# EAGLE board expLoRaBLE Thing Plus (EAGLE 9.6.2)
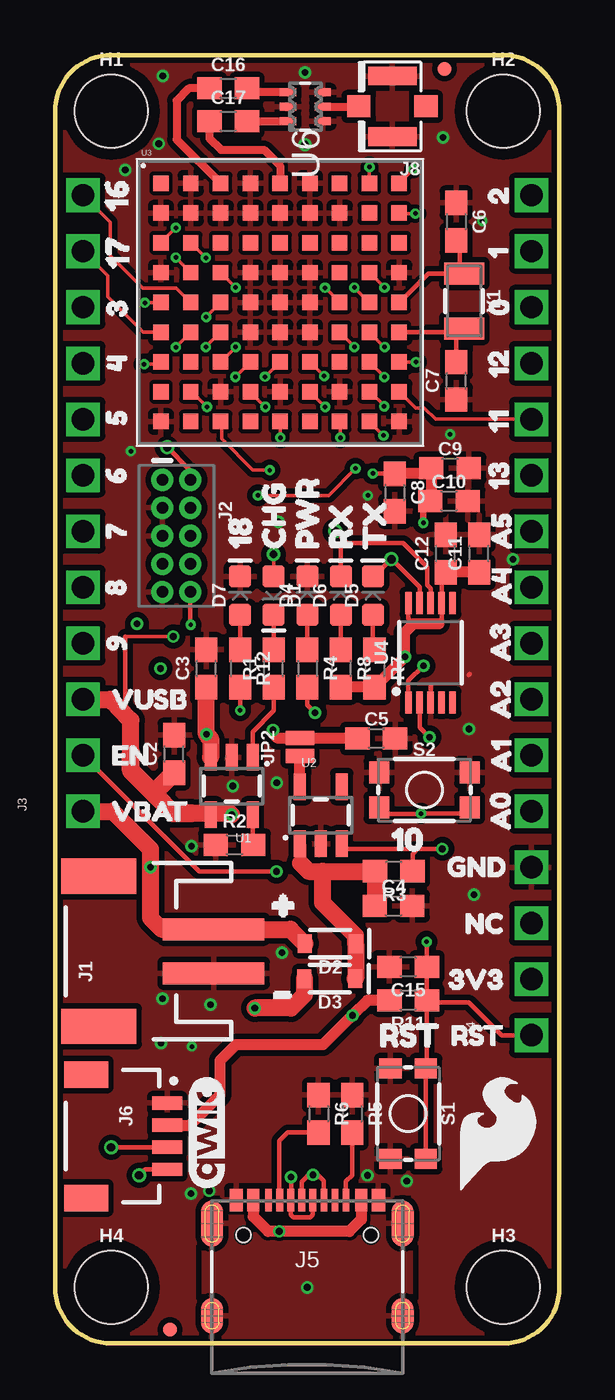
[diagram p0: board, top side]
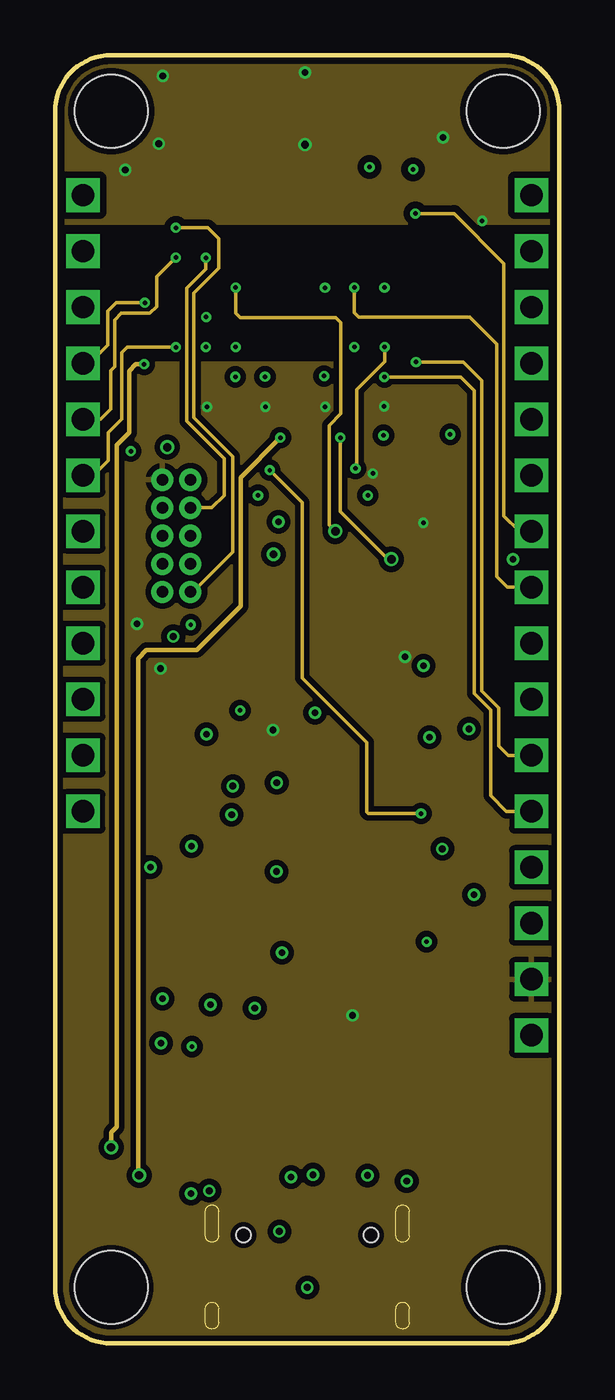
[diagram p1: board, inner layer Route2]
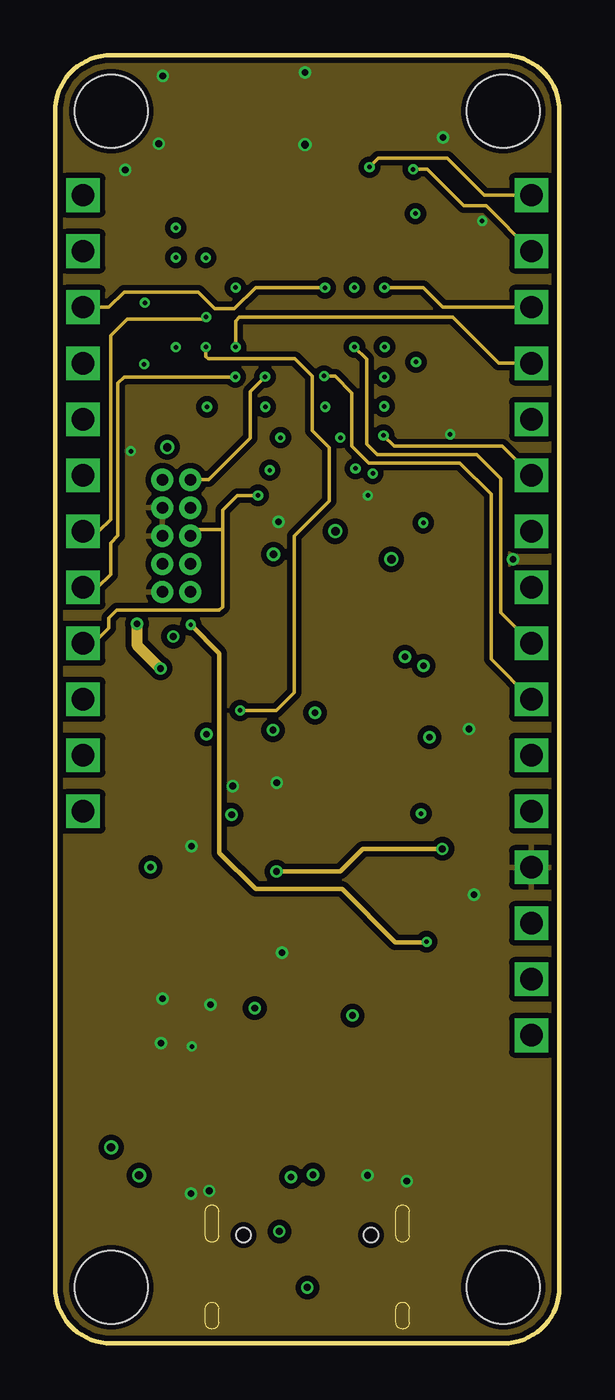
[diagram p2: board, inner layer Route15]
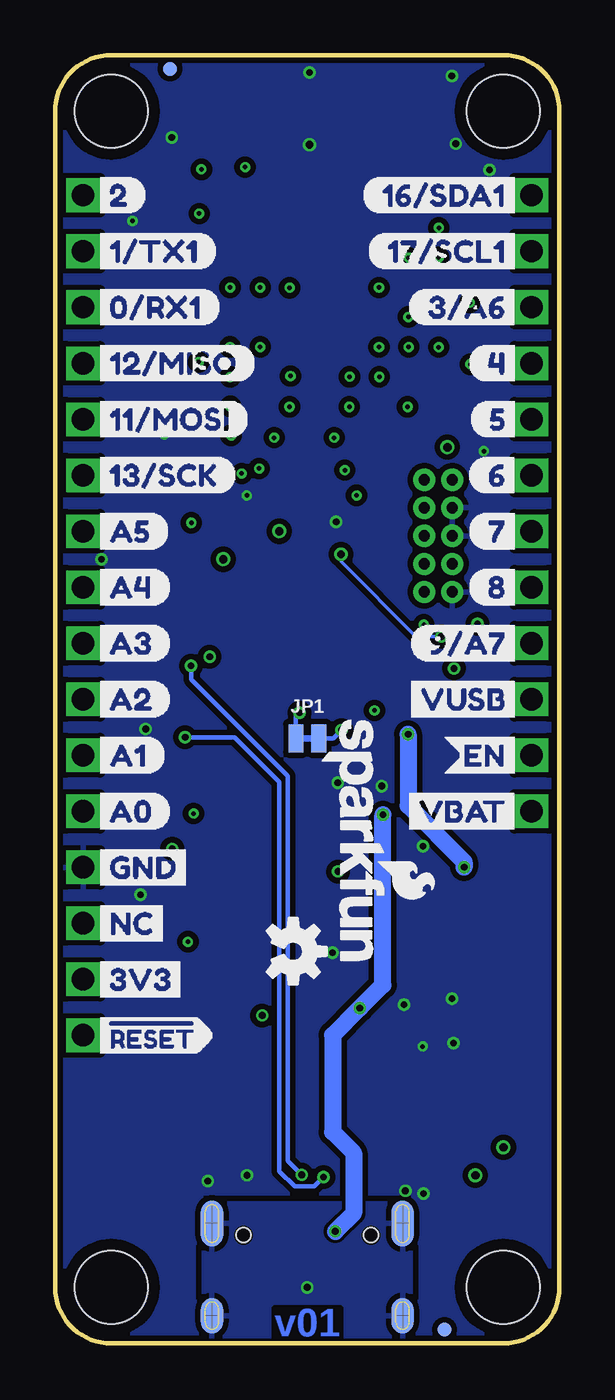
[diagram p3: board, bottom side, seen from below]

Size 22.86 x 58.42 mm. Coordinates in mm from the lower left corner, seen from the top.
Outline: 0,55.88 0,2.54 arc90 2.54,0 20.32,0 arc90 22.86,2.54 22.86,55.88 arc90 20.32,58.42 2.54,58.42 arc90 0,55.88
Copper layers (1+2*15+16): Top 0.035559375mm / dielectric 0.2mm / Route2 0.035559375mm / dielectric 1mm / Route15 0.035559375mm / dielectric 0.2mm / Bottom 0.035559375mm
Design rules "SparkFun-4-layer-FAB-LIMIT *": minimum track width 6mil, minimum drill 8mil, track to track 6mil, track to pad 6mil, pad to pad 6mil, via to via 6mil, smd to smd 6mil, copper to edge 4mil, drill to drill 4mil, minimum pad ring 5mil, minimum via ring 5mil, stop-mask expansion 4mil, vias tented up to drill 25mil, thermal gap 10mil
Net classes: 1 power: width 0.762 mm

## Footprints (pad centres in the part's own frame; a part is rotated, then mirrored left to right if it is on the bottom)
0603 = smd 1.1 x 1: 1 -0.85,0; 2 0.85,0
LED-0603 = smd 1 x 1: A -0.877,0; C 0.877,0
SOD-323 = smd 0.63 x 0.83: A 1.15,0; C -1.15,0
FIDUCIAL-MICRO = smd 0.635 x 0.635: 1 0,0
STAND-OFF = hole 3.302: 0,0
JST-2-SMD = smd 1 x 4.6: 1 -1,-3.7; 2 1,-3.7 | smd 1.6 x 3.4: NC1 -3.4,1.5; NC2 3.4,1.5
2X5-PTH-1.27MM-NO_SILK = drill 0.508 pad 1: 1 -2.54,-0.635; 2 -2.54,0.635; 3 -1.27,-0.635; 4 -1.27,0.635; 5 0,-0.635; 6 0,0.635; 7 1.27,-0.635; 8 1.27,0.635; 9 2.54,-0.635; 10 2.54,0.635
1X12_SM_SQ_NOSILK = drill 1.016 pad 1.27 square: 1 0,0; 2 2.54,0; 3 5.08,0; 4 7.62,0; 5 10.16,0; 6 12.7,0; 7 15.24,0; 8 17.78,0; 9 20.32,0; 10 22.86,0; 11 25.4,0; 12 27.94,0
1X16_SM_SQ_NOSILK = drill 1.016 pad 1.27 square: 1 0,0; 2 2.54,0; 3 5.08,0; 4 7.62,0; 5 10.16,0; 6 12.7,0; 7 15.24,0; 8 17.78,0; 9 20.32,0; 10 22.86,0; 11 25.4,0; 12 27.94,0; 13 30.48,0; 14 33.02,0; 15 35.56,0; 16 38.1,0
USB-C-16P = smd 0.3 x 1.016: A5 -1.25,0.154; A6 -0.25,0.154; A7 0.25,0.154; A8 1.25,0.154; B5 1.75,0.154; B6 0.75,0.154; B7 -0.75,0.154; B8 -1.75,0.154 | smd 0.6 x 1.016: GND -3.225,0.154; GND2 3.225,0.154 | smd 1 x 2.1: SHLD1 -4.32,-0.915; SHLD2 4.32,-0.915 | smd 1 x 2.1 bottom: SHLD3 -4.32,-0.915; SHLD4 4.32,-0.915 | smd 1 x 1.6: SHLD5 -4.32,-5.095; SHLD8 4.32,-5.095 | smd 1 x 1.6 bottom: SHLD6 -4.32,-5.095; SHLD7 4.32,-5.095 | smd 0.55 x 1.016: VBUS1 -2.45,0.154; VBUS2 2.45,0.154 | hole 0.65: -2.89,-1.445; 2.89,-1.445
JST04_1MM_RA = smd 0.6 x 1.35: 1 -1.5,0; 2 -0.5,0; 3 0.5,0; 4 1.5,0 | smd 1.2 x 2: NC1 2.8,-3.675; NC2 -2.8,-3.675
U.FL = smd 2.2 x 0.85: 1 0,1.375; 2 0,-1.375 | smd 1.05 x 1: FEED 1.525,0; NC -1.525,0
SMT-JUMPER_2_NC_TRACE_NO-SILK = smd 0.66 x 1.27: 1 -0.521,0; 2 0.521,0
SMT-JUMPER_2_NC_PASTE_NO-SILK = smd 0.635 x 1.27: 1 -0.406,0; 2 0.406,0
TACTILE_SWITCH_SMD_4.6X2.8MM = smd 0.9 x 1: 1 -2.05,-0.8; 2 2.05,-0.8; 3 2.05,0.8; 4 -2.05,0.8
TP_15TH = drill 0.381 pad 0.61: P$1 0,0
SOT23-5 = smd 0.55 x 1.2: 1 -0.95,-1.3; 2 0,-1.3; 3 0.95,-1.3; 4 0.95,1.3; 5 -0.95,1.3
LGA81 = smd 0.7 x 0.7: A1 -5.4,5.4; A2 -4.05,5.4; A3 -2.7,5.4; A4 -1.35,5.4; A5 0,5.4; A6 1.35,5.4; A7 2.7,5.4; A8 4.05,5.4; A9 5.4,5.4; B1 -5.4,4.05; B2 -4.05,4.05; B3 -2.7,4.05; B4 -1.35,4.05; B5 0,4.05; B6 1.35,4.05; B7 2.7,4.05; B8 4.05,4.05; B9 5.4,4.05; C1 -5.4,2.7; C2 -4.05,2.7; C3 -2.7,2.7; C4 -1.35,2.7; C5 0,2.7; C6 1.35,2.7; C7 2.7,2.7; C8 4.05,2.7; C9 5.4,2.7; D1 -5.4,1.35; D2 -4.05,1.35; D3 -2.7,1.35; D4 -1.35,1.35; D5 0,1.35; D6 1.35,1.35; D7 2.7,1.35; D8 4.05,1.35; D9 5.4,1.35; E1 -5.4,0; E2 -4.05,0; E3 -2.7,0; E4 -1.35,0; E5 0,0; E6 1.35,0; E7 2.7,0; E8 4.05,0; E9 5.4,0; F1 -5.4,-1.35; F2 -4.05,-1.35; F3 -2.7,-1.35; F4 -1.35,-1.35; F5 0,-1.35; F6 1.35,-1.35; F7 2.7,-1.35; F8 4.05,-1.35; F9 5.4,-1.35; G1 -5.4,-2.7; G2 -4.05,-2.7; G3 -2.7,-2.7; G4 -1.35,-2.7; G5 0,-2.7; G6 1.35,-2.7; G7 2.7,-2.7; G8 4.05,-2.7; G9 5.4,-2.7; H1 -5.4,-4.05; H2 -4.05,-4.05; H3 -2.7,-4.05; H4 -1.35,-4.05; H5 0,-4.05; H6 1.35,-4.05; H7 2.7,-4.05; H8 4.05,-4.05; H9 5.4,-4.05; J1 -5.4,-5.4; J2 -4.05,-5.4; J3 -2.7,-5.4; J4 -1.35,-5.4; J5 0,-5.4; J6 1.35,-5.4; J7 2.7,-5.4; J8 4.05,-5.4; J9 5.4,-5.4
MSOP10 = smd 1 x 0.3: 1 -2.25,1; 2 -2.25,0.5; 3 -2.25,0; 4 -2.25,-0.5; 5 -2.25,-1; 6 2.25,-1; 7 2.25,-0.5; 8 2.25,0; 9 2.25,0.5; 10 2.25,1
RF_4060A1_TDK = smd 0.356 x 0.737: 1 -0.65,-0.787; 2 0,-0.787; 3 0.65,-0.787; 4 0.65,0.787; 5 0,0.787; 6 -0.65,0.787
CRYSTAL-SMD-3.2X1.5MM = smd 1 x 1.8: P$1 -1.25,0; P$2 1.25,0

## Placement (x,y rotation side)
C2  4.7uF  [0603]  5.4,26.73 90 top
C3  4.7uF  [0603]  6.86,30.61 90 top
C4  1.0uF  [0603]  15.34,19.84 0 top
C5  1.0uF  [0603]  14.56,27.43 0 top
C6  15pF  [0603]  18.17,50.87 270 top
C7  15pF  [0603]  18.18,43.65 90 top
C8  10uF  [0603]  15.39,38.59 270 top
C9  1.0uF  [0603]  17.9,39.68 0 top
C10  0.1uF  [0603]  17.85,38.2 0 top
C11  0.1uF  [0603]  19.22,35.82 90 top
C12  10nF  [0603]  17.7,35.82 90 top
C15  1nF  [0603]  16,17.08 180 top
C16  47pF  [0603]  7.84,56.91 0 top
C17  10pF  [0603]  7.84,55.42 0 top
D1  Yellow  [LED-0603]  9.91,33.91 270 top
D2  3A/10V/280mV  [SOD-323]  12.47,18.12 180 top
D3  3A/10V/280mV  [SOD-323]  12.45,16.54 180 top
D4  RED  [LED-0603]  11.43,33.91 90 top
D5  GREEN  [LED-0603]  14.4,33.91 90 top
D6  Yellow  [LED-0603]  12.95,33.91 90 top
D7  BLUE  [LED-0603]  8.38,33.91 90 top
FD1  FIDUCIALUFIDUCIAL  [FIDUCIAL-MICRO]  17.65,57.78 0 bottom
FD2  FIDUCIALUFIDUCIAL  [FIDUCIAL-MICRO]  17.65,57.78 0 top
FD3  FIDUCIALUFIDUCIAL  [FIDUCIAL-MICRO]  5.21,0.64 0 bottom
FD4  FIDUCIALUFIDUCIAL  [FIDUCIAL-MICRO]  5.21,0.64 0 top
FRAME1  FRAME-LETTER  [CREATIVE_COMMONS]  -12.7,-20.32 0 top  (outside the outline)
FRAME2  FRAME-LETTERNO_PACKAGE  [DUMMY]  -12.7,-20.32 0 top  (outside the outline)
H1  STAND-OFF  [STAND-OFF]  2.54,55.88 0 top
H2  STAND-OFF  [STAND-OFF]  20.32,55.88 0 top
H3  STAND-OFF  [STAND-OFF]  20.32,2.54 0 top
H4  STAND-OFF  [STAND-OFF]  2.54,2.54 0 top
J1  [JST-2-SMD]  3.48,17.78 90 top
J2  CORTEX_DEBUG  [2X5-PTH-1.27MM-NO_SILK]  5.5,36.62 270 top
J3  [1X12_SM_SQ_NOSILK]  1.27,24.13 90 top
J4  [1X16_SM_SQ_NOSILK]  21.59,13.97 90 top
J5  USB-C  [USB-C-16P]  11.43,6.35 0 top
J6  [JST04_1MM_RA]  5.08,9.4 270 top
J8  U.FL  [U.FL]  15.28,56.1 180 top
JP1  JUMPER-SMT_2_NC_TRACE_NO-SILK  [SMT-JUMPER_2_NC_TRACE_NO-SILK]  11.43,27.43 0 bottom
JP2  JUMPER-SMT_2_NC_PASTE_NO-SILK  [SMT-JUMPER_2_NC_PASTE_NO-SILK]  11.1,27.05 90 top
LOGO1  OSHW-LOGOS  [OSHW-LOGO-S]  12.06,17.78 270 bottom
LOGO2  QWIIC_LOGO_5MM  [QWIIC_5MM]  6.86,9.53 90 top
LOGO3  SFE_LOGO_NAME_FLAME.1_INCH  [SFE_LOGO_NAME_FLAME_.1]  10.86,28.7 270 bottom
R1  1k  [0603]  9.91,30.61 90 top
R2  2.0k  [0603]  8.13,22.61 0 top
R3  10k  [0603]  15.35,21.41 180 top
R4  1k  [0603]  11.43,30.61 270 top
R5  5.1k  [0603]  13.46,10.41 270 top
R6  5.1k  [0603]  11.94,10.41 270 top
R7  1k  [0603]  14.48,30.61 270 top
R8  1k  [0603]  12.95,30.61 270 top
R11  100k  [0603]  16,15.56 180 top
R12  1k  [0603]  8.38,30.61 270 top
S1  RESET  [TACTILE_SWITCH_SMD_4.6X2.8MM]  16,10.41 270 top
S2  USER  [TACTILE_SWITCH_SMD_4.6X2.8MM]  16.74,25.1 0 top
TP1  TEST-POINTTP_15TH_THRU  [TP_15TH]  5.08,40.64 0 top
TP2  TEST-POINTTP_15TH_THRU  [TP_15TH]  12.7,36.83 0 top
TP3  TEST-POINTTP_15TH_THRU  [TP_15TH]  15.24,35.56 0 top
TP4  TEST-POINTTP_15TH_THRU  [TP_15TH]  3.81,7.62 0 top
TP5  TEST-POINTTP_15TH_THRU  [TP_15TH]  2.54,8.89 0 top
U1  MCP73831  [SOT23-5]  8,25.27 180 top
U2  3.3V  [SOT23-5]  12.04,23.95 0 top
U3  NM180100  [LGA81]  10.2,47.21 0 top
U4  CH340E_MSOP10  [MSOP10]  17.02,31.32 90 top
U6  DPX202700DT-4162A1  [RF_4060A1_TDK]  11.34,56.08 90 top
U$1  [160]  2.77,50.46 90 top
U$2  [171]  2.82,47.87 90 top
U$3  [32]  2.79,45.75 90 top
U$4  [43]  2.79,43.28 90 top
U$5  [54]  2.77,40.83 90 top
U$6  [65]  2.74,38.2 90 top
U$7  [76]  2.77,35.55 90 top
U$8  [87]  2.74,32.96 90 top
U$9  [98]  2.79,30.61 90 top
U$10  [VUSB9]  1.78,29.21 0 top
U$11  [EN10]  1.78,26.67 0 top
U$12  [VBAT11]  1.78,24.13 0 top
U$13  [227]  20.09,50.86 90 top
U$14  [126]  20.07,48.41 90 top
U$15  [025]  20.12,45.81 90 top
U$16  [1123]  20.09,40.5 90 top
U$17  [1224]  20.09,42.81 90 top
U$18  [1322]  20.1,37.92 90 top
U$19  [A521]  20.22,35.23 90 top
U$20  [A420]  20.23,32.73 90 top
U$21  [A319]  20.18,30.14 90 top
U$22  [A218]  20.19,27.39 90 top
U$23  [A117]  20.21,25.12 90 top
U$24  [A016]  20.18,22.48 90 top
U$25  [GND13]  16.98,21.62 0 top
U$26  [NC12]  17.78,19.05 0 top
U$27  [3V314]  17.02,16.51 0 top
U$28  [RST15]  17.14,13.97 0 top
U$29  [184]  8.38,35.12 90 top
U$30  [CHG1]  9.91,35.12 90 top
U$31  [PWR2]  11.43,35.12 90 top
U$32  [RX3]  12.95,35.12 90 top
U$33  [TX4]  14.48,35.12 90 top
U$34  [20]  21.35,52.07 0 bottom
U$35  [1#TX11]  21.35,49.53 0 bottom
U$36  [0#RX12]  21.31,46.99 0 bottom
U$37  [12#MISO3]  21.31,44.45 0 bottom
U$38  [11#MOSI4]  21.34,41.91 0 bottom
U$39  [13#SCK5]  21.35,39.37 0 bottom
U$40  [A56]  21.31,36.83 0 bottom
U$41  [A47]  21.3,34.29 0 bottom
U$42  [A38]  21.34,31.75 0 bottom
U$43  [A29]  21.35,29.21 0 bottom
U$44  [A110]  21.3,26.67 0 bottom
U$45  [A011]  21.35,24.13 0 bottom
U$46  [GND12]  21.31,21.59 0 bottom
U$47  [NC13]  21.31,19.05 0 bottom
U$48  [3V314]  21.35,16.51 0 bottom
U$49  [#RESET15]  21.46,13.97 0 bottom
U$50  [16#SDA12]  8.95,52.07 0 bottom
U$51  [17#SCL13]  8.71,49.53 0 bottom
U$52  [412]  4.2,44.45 0 bottom
U$53  [513]  4.11,41.91 0 bottom
U$54  [614]  4.16,39.37 0 bottom
U$55  [715]  4.16,36.83 0 bottom
U$56  [816]  4.15,34.29 0 bottom
U$57  [9#A719]  6.79,31.75 0 bottom
U$58  [3#A60]  6.88,46.99 0 bottom
U$59  [VUSB25]  7.23,29.21 0 bottom
U$60  [EN26]  5.28,26.67 0 bottom
U$61  [VBAT27]  7.28,24.13 0 bottom
U$62  [100]  14.34,22.86 0 top
U$63  [RST1]  13.78,13.97 0 top
U$64  [FOUR_LAYER_WARNING]  -1.09,66.7 0 top  (outside the outline)
U$65  [SFE_LOGO_FLAME_.2]  18.05,6.69 0 top
U$67  [#0]  8.45,20.07 0 top
U$68  [#1]  8.45,16.13 0 top
Y1  32.768kHz  [CRYSTAL-SMD-3.2X1.5MM]  18.55,47.27 270 top

## Library data of the parts
C2 C3 = SparkFun-Capacitors; PROD_ID: CAP-08280
C4 C5 C9 = SparkFun-Capacitors; PROD_ID: CAP-00868
C6 C7 = SparkFun-Capacitors; PROD_ID: CAP-07881
C8 = SparkFun-Capacitors; PROD_ID: CAP-11015
C10 C11 = SparkFun-Capacitors; PROD_ID: CAP-00810
C12 = SparkFun-Capacitors; PROD_ID: CAP-00867
C15 = SparkFun-Capacitors; PROD_ID: CAP-07886
C16 = SparkFun-Capacitors; PROD_ID: CAP-08913
C17 = SparkFun-Capacitors; PROD_ID: CAP-11812
D1 D6 = SparkFun-LED; PROD_ID: DIO-09003
D2 D3 = SparkFun-DiscreteSemi; PROD_ID: DIO-14072
D4 = SparkFun-LED; PROD_ID: DIO-00819
D5 = SparkFun-LED; PROD_ID: DIO-00821
D7 = SparkFun-LED; PROD_ID: DIO-08575
FD1-FD4 FRAME1 LOGO1-LOGO3 U$64 U$65 = SparkFun-Aesthetics
FRAME2 = SparkFun-Aesthetics; DESIGNER: Nobody; VERSION: v01
H1-H4 = SparkFun-Hardware
J1 = SparkFun-Connectors; PROD_ID: CONN-11443; SF_ID: PRT-08612
J2-J4 TP1-TP5 = SparkFun-Connectors
J5 = SparkFun-Connectors; PROD_ID: CONN-14122
J6 = SparkFun-Connectors; PROD_ID: CONN-13694
J8 = SparkFun-Connectors; PROD_ID: CONN-09193; SF_ID: WRL-09144
JP1 JP2 = SparkFun-Jumpers
R1 R4 R7 R8 R12 = SparkFun-Resistors; PROD_ID: RES-07856
R2 = SparkFun-Resistors; PROD_ID: RES-08296
R3 = SparkFun-Resistors; PROD_ID: RES-00824
R5 R6 = SparkFun-Resistors; PROD_ID: RES-12083
R11 = SparkFun-Resistors; PROD_ID: RES-07828
S1 S2 = SparkFun-Switches; PROD_ID: SWCH-13065
U1 = SparkFun-IC-Power; PROD_ID: IC-09995
U2 = SparkFun-IC-Power; PROD_ID: VREG-12457
U3 = JTD_Consulting
U4 = SparkFun-IC-Comms; PROD_ID: IC-14135
U6 = DPX202700DT; BUILT_BY: EMA_Matt; COPYRIGHT: Copyright (C) 2018 Accelerated Designs. All rights reserved; MANUFACTURER_PART_NUMBER: DPX202700DT-4162A1; SOURCELIBRARY: TDK_2019-10-09; VENDOR: TDK
U$1 U$2 U$29 U$50 U$51 = buzzard_labels (11)
U$3-U$28 = buzzard_labels
U$30-U$33 = buzzard_labels (1)
U$34-U$45 U$52-U$57 = buzzard_labels (6)
U$46-U$49 U$59-U$61 = buzzard_labels (2)
U$58 = buzzard_labels (7)
U$62 U$63 = buzzard_labels (3)
U$67 U$68 = buzzard_labels (13)
Y1 = SparkFun-Clocks; PROD_ID: XTAL-13062

## Nets
3.3V: C5.1 C8.1 C9.1 C10.1 C11.1 C12.1 J2.1 J4.2 J6.2 JP1.2 JP2.2 R7.2 R8.2 R11.2 U3.H2 U3.H4 U3.H6 U3.H8 U4.7 U4.10
!RESET: C15.1 J2.10 J4.1 R11.1 S1.3 S1.4 U3.C1
BT_RF: C17.1 U3.A5
CC1: J5.A5 R6.2
CC2: J5.B5 R5.2
D10/SWCH: S2.1 S2.2 U3.J3
D14/QWIIC_SDA: J6.3 TP5.P$1 U3.G1
D+1: J5.A6 J5.B6 U4.1
D-1: J5.A7 J5.B7 U4.2
EN: J3.2 R3.1 U2.3
GND: C2.2 C3.2 C4.2 C5.2 C6.1 C7.1 C8.2 C9.2 C10.2 C11.2 C12.2 C15.2 D4.C D7.C J1.1 J2.3 J2.5 J2.9 J4.4 J5.GND J5.GND2 J6.1 J8.1 J8.2 R2.1 R5.1 R6.1 S1.1 S1.2 S2.3 S2.4 U1.2 U2.2 U3.A2 U3.A4 U3.A6 U3.B1 U3.B2 U3.B3 U3.B4 U3.B5 U3.B6 U3.B7 U3.D1 U3.D4 U3.D5 U3.D6 U3.D9 U3.E4 U3.E5 U3.E6 U3.F4 U3.F5 U3.F6 U3.H3 U3.H5 U3.H7 U3.J1 U3.J9 U4.3 U6.1 U6.3 U6.5
LORA_RF: C16.1 U3.A3
N$1: R2.2 U1.5
N$2: C7.2 U3.F9 Y1.P$2
N$3: D1.C R1.2
N$4: R1.1 U1.1
N$5: D5.A R7.1
N$6: JP1.1 R4.2
N$7: D7.A R12.1
N$8: C6.2 U3.E9 Y1.P$1
N$9: D6.A R8.1
N$10: D4.A R4.1
N$11: C17.2 U6.6
N$12: J8.FEED U6.2
N$13: C16.2 U6.4
N$14: JP2.1 U2.5
RXI-0: D6.C TP2.P$1 U3.D3 U4.8
SHLD: J5.SHLD1 J5.SHLD2 J5.SHLD3 J5.SHLD4 J5.SHLD5 J5.SHLD6 J5.SHLD7 J5.SHLD8
SWDCK: J2.4 U3.C2
SWDIO: J2.2 TP1.P$1 U3.G5
TXO-0: D5.C TP3.P$1 U3.J7 U4.9
V_BATT [power]: C3.1 D2.A J1.2 J3.1 U1.3
V_USB: C2.1 D1.A D3.A J3.3 J5.VBUS1 J5.VBUS2 U1.4
VIN: C4.1 D2.C D3.C R3.2 U2.1
~D0/RXI-1: J4.14 U3.D8
~D1/TXO-1: J4.15 U3.A9
~D2: J4.16 U3.A8
~D3/A6: J3.10 U3.E7
~D4: J3.9 U3.E1
~D5: J3.8 U3.D2
~D6: J3.7 U3.F2
~D7: J3.6 U3.E3
~D8: J3.5 U3.G4
~D9/A7: J2.6 J3.4 U3.F8
~D11/MOSI: J4.12 U3.H9
~D12/MISO: J4.13 U3.G3
~D13/SCK: J4.11 U3.J8
~D15/QWIIC_SCL: J6.4 TP4.P$1 U3.J5
~D16/SDA1: J3.12 U3.E2
~D17/SCL1: J3.11 U3.F1
~D18/LED: R12.2 U3.F3
~D19/A0: J4.5 U3.G8
~D20/A1: J4.6 U3.G9
~D21/A2: J4.7 U3.G6
~D22/A3: J4.8 U3.F7
~D23/A4: J4.9 U3.E8
~D24/A5: J4.10 U3.B9

## Tracks (layer width: path | path; a pad name or v marks a point on that pad's centre or on a via)
3.3V  (via drill 0.2, 0.3)
  Top 0.152: v14.91,42.49 14.91,42.52 14.27,43.16 U3.H8 | U3.H4 8.85,43.15 v9.53,42.47 | U3.H6 v12.23,42.47 | U3.H2 6.2,43.16 v6.88,42.47
  Top 0.203: 17.52,34.78 U4.7 17.52,32.64 17.4,32.64 | U4.10 16.02,32.88 16.26,32.64 | C8.1 14.41,39.44 v14.4,39.45
  Top 0.305: v16.69,37.21 16.69,37.8 17.05,38.15 17.2,38.3
  Top 0.508: C8.1 16.8,39.44 C9.1 17.05,38.45 17.2,38.3 | R8.2 R7.2 v15.86,31.13 15.86,32.24 16.26,32.64 17.4,32.64 | C11.1 C12.1 17.52,34.78 | R11.2 14.16,15.56 v13.47,14.87 12.14,13.54 8.18,13.54 7.47,12.83 7.47,11.27 6.1,9.9 J6.2 | 17.05,38.15 C10.1 | C5.1 13.7,27.46 JP2.2 11.08,27.43 10.1,27.43 9.88,27.65 v9.88,27.81
  Route2 0.203: 4.8,30.61 v4.78,30.61
  Route15 0.508: v3.71,32.64 3.71,31.67 v4.78,30.61
  Bottom 0.203: v9.88,27.81 10.26,27.43 JP1.2
  pour Route2 (isolate 0.254): 0,0 0,44.45 22.86,44.45 22.86,0
!RESET  (via drill 0.2)
  Top 0.152: U3.C1 v5.47,50.59
  Top 0.203: S1.3 S1.4 16.85,12.51 R11.1 | R11.1 C15.1 16.84,17.09 v16.84,18.21 | R11.1 16.94,15.47 18.75,15.47 20.24,13.97 J4.1 | J2.10 6.13,32.6 v6.15,32.59
  Route2 0.152: v5.47,50.59 6.92,50.59 7.42,50.09 7.42,48.77 6.27,47.62 6.27,41.99 8.05,40.21 8.05,35.89 6.24,34.08 J2.10
  Route15 0.203: v6.15,32.59 7.44,31.29 7.44,22.25 9.09,20.6 13.01,20.6 15.42,18.19 16.82,18.19 v16.84,18.21
BT_RF
  Top 0.356: C17.1 7,54.65 7.52,54.13 9.47,54.13 10.2,53.4 U3.A5
CC1
  Top 0.203: R6.2 11.93,9.58 10.54,9.58 10.15,9.19 10.15,6.53 J5.A5
CC2
  Top 0.203: R5.2 13.46,7.62 13.18,7.34 J5.B5
D10/SWCH  (via drill 0.2)
  Top 0.152: S2.2 18.52,24.03 | U3.J3 7.54,41.76 7.54,41.02 8.97,39.6 v9.73,39.6
  Top 0.203: S2.1 14.97,24.02 16.57,24.02 v16.59,24.03 18.52,24.03
  Route2 0.152: v9.73,39.6 11.2,38.12 11.2,30.18 14.12,27.25 14.12,24.11 14.2,24.03 v16.59,24.03
D14/QWIIC_SDA  (via drill 0.2)
  Top 0.152: U3.G1 4.69,44.4 v4.04,44.4 | TP5.P$1
  Top 0.203: TP5.P$1 J6.3
  Route2 0.203: v4.04,44.4 3.66,44.4 3.35,44.09 3.35,41.3 2.79,40.74 2.79,9.83 2.54,9.58 TP5.P$1
D+1  (via drill 0.3)
  Top 0.203: J5.B6 12.18,7.38 11.91,7.64 v11.68,7.64 11.51,7.64 11.18,7.32 J5.A6 | U4.1 16.02,30.05 v16.7,30.73
  Bottom 0.203: v16.7,30.73 16.7,30.1 12.32,25.72 12.32,8.29 v11.68,7.64
D-1  (via drill 0.3)
  Top 0.203: J5.A7 11.68,5.84 11.56,5.71 10.79,5.71 10.68,5.83 J5.B7 10.69,6.52 v10.69,7.54 | v16.97,27.48 16.52,27.93 U4.2
  Bottom 0.203: v16.97,27.48 14.72,27.48 12.7,25.46 12.7,7.81 12,7.11 11.12,7.11 v10.69,7.54
EN  (via drill 0.3)
  Top 0.203: 12.99,23.14 U2.3 13.23,22.42 16.42,22.42 | J3.2 6.54,21.4 v10.03,21.4 | v17.55,22.42 v17.54,22.42 16.42,22.42 | R3.1 16.2,22.2 16.42,22.42
  Route15 0.203: v10.03,21.4 12.92,21.4 13.94,22.42 v17.55,22.42
GND  (via drill 0.2, 0.2 pad 0.1, 0.3, 0.35)
  Top 0.2: U4.3 17.02,29.84 17.04,29.87
  Top 0.203: 18.76,30.32 18.8,30.35
  other vias: 6.18,22.54 18.99,20.35 10.05,25.43 10.12,37.26 8.05,25.27 6.99,6.92 14.16,7.62 6.16,6.79 15.94,7.37 4.8,13.61 4.86,15.63 10.29,17.72 7.05,15.37 18.76,27.86 20.76,35.56 17.91,41.22 3.43,40.46 14.17,38.46 6.2,13.46 19.35,50.9 17.58,54.69 4.88,57.48 4.7,54.41 11.33,54.36 11.33,57.63 3.17,53.21
  pour Top (isolate 0.254, rank 2): 0,0 0,58.42 22.86,58.42 22.86,0
  pour Bottom (isolate 0.254, rank 2): 0,0 0,58.42 22.86,58.42 22.86,0
  pour Route15 (isolate 0.254): 0,58.42 22.86,58.42 22.86,0 0,0
  pour Top (isolate 0.178): 3.71,53.7 16.69,53.7 16.69,40.72 3.71,40.72
  pour Route2 (isolate 0.305): 0,58.42 22.86,58.42 22.86,50.8 0,50.8
LORA_RF
  Top 0.356: C16.1 6.06,56.91 5.51,56.36 5.51,54.59 U3.A3
N$1
  Top 0.203: U1.5 8.95,22.63 R2.2
N$2
  Top 0.152: Y1.P$2 18.38,45.86 18.16,45.86 18.18,45.83
  Top 0.203: U3.F9 18.16,45.86 | C7.2 18.18,45.83
N$3
  Top 0.203: D1.C R1.2
N$4
  Top 0.203: U1.1 8.95,27.73 9.91,28.69 R1.1
N$5
  Top 0.203: D5.A 14.4,31.53 R7.1
N$6  (via drill 0.3)
  Top 0.203: v11.79,28.6 11.43,28.96 R4.2
  Bottom 0.203: JP1.1 11.95,28.43 v11.79,28.6
N$7
  Top 0.203: D7.A R12.1
N$8
  Top 0.152: 18.34,48.52 Y1.P$1 | C6.2 18.34,49.86
  Top 0.203: U3.E9 16.91,48.52 18.34,48.52 18.34,49.86
N$9
  Top 0.203: D6.A R8.1
N$10
  Top 0.203: D4.A R4.1
N$11
  Top 0.203: 10.54,55.42 U6.6
  Top 0.356: C17.2 10.54,55.42
N$12
  Top 0.203: 13.74,56.08 J8.FEED
  Top 0.356: U6.2 13.74,56.08
N$13
  Top 0.356: U6.4 8.87,56.73 C16.2
N$14
  Top 0.508: U2.5 JP2.1
RXI-0  (via drill 0.2)
  Top 0.152: U3.D3 v8.18,47.88
  Top 0.203: 13.23,36.3 TP2.P$1 | 13.23,36.3 12.95,36.3 D6.C | 13.23,36.3 15.77,36.3 16.87,35.2 16.87,34.39 17.02,34.24 U4.8
  Route2 0.152: v8.18,47.88 8.18,46.71 8.38,46.51 12.72,46.51 12.95,46.28 12.95,42.16 12.42,41.63 12.42,37.11 TP2.P$1
SHLD  (via drill 0.3)
  other vias: 11.43,2.54
  pour Bottom: 16.13,0 6.73,0 6.73,6.35 16.13,6.35
  pour Top: 16.13,0 6.73,0 6.73,6.35 16.13,6.35
SWDCK  (via drill 0.2 pad 0.4)
  Top 0.152: U3.C2 v6.83,49.23
  Route2 0.152: v6.83,49.23 6.83,48.72 5.97,47.85 5.97,41.83 7.67,40.13 7.67,38.46 7.11,37.89 J2.4
SWDIO  (via drill 0.2)
  Top 0.152: U3.G5 9.52,43.83 v9.51,43.83 | 6.11,39.19 J2.2
  Top 0.203: TP1.P$1 6.11,39.61 6.11,39.19
  Route15 0.152: v9.51,43.83 8.84,43.16 8.84,41.05 6.95,39.16 J2.2
TXO-0  (via drill 0.2)
  Top 0.152: U3.J7 12.93,41.78 v12.93,41.07
  Top 0.203: U4.9 16.52,34.3 15.26,35.56 TP3.P$1 14.47,34.79 D5.C
  Route2 0.152: v12.93,41.07 12.93,37.72 15.09,35.56 TP3.P$1
V_BATT  (via drill 0.3)
  Top 0.762: J3.1 2.6,24.13 4.32,22.42 v4.32,21.59 4.32,19.3 4.84,18.78 J1.2 10.66,18.78 D2.A | U1.3 7.05,27.43 v6.86,27.62 C3.1
  Bottom 0.762: v6.86,27.62 6.86,24.38 4.32,21.84 v4.32,21.59
V_USB  (via drill 0.3, 0.35)
  Top 0.152: D1.A v9.91,35.79 v9.9,35.8 v9.9,35.79 | v5.35,32.05 3.17,32.05
  Top 0.203: 2.86,28.83 3.17,29.15 3.17,32.05
  Top 0.508: J5.VBUS1 8.98,5.75 9.65,5.08 v10.16,5.08 13.34,5.08 13.88,5.62 J5.VBUS2
  Top 0.762: J3.3 2.48,29.21 2.86,28.83 3.43,28.26 3.43,26.8 | 7.05,24.04 6.18,24.04 | 7.05,24.04 U1.4 | v8,23.97 7.93,24.04 7.05,24.04 | D3.A 11.3,15.8 10.7,15.21 v9.05,15.21
  Top 0.813: 6.18,24.04 5.36,24.04 4.54,24.86 | 4.54,24.86 3.43,25.97 3.43,26.8 | 4.54,24.86 4.54,25.03 C2.1
  Bottom 0.152: v9.9,35.79 9.9,35.45 6.5,32.05 v5.35,32.05
  Bottom 0.762: v8,23.97 8,16.26 v9.05,15.21 10.29,13.97 10.29,9.59 9.34,8.64 9.34,5.91 v10.16,5.08
VIN
  Top 0.508: U2.1 11.12,22.62 11.12,21.77
  Top 0.762: D3.C 13.62,16.56 D2.C 13.62,18.48 12.13,19.98 12.13,21.4 | 12.13,21.4 11.49,21.4 11.12,21.77 | C4.1 14.5,19.85 R3.2 12.14,21.41 12.13,21.4
~D0/RXI-1  (via drill 0.2)
  Top 0.152: U3.D8 v14.93,47.88
  Route15 0.152: v14.93,47.88 16.68,47.88 17.58,46.99 J4.14
~D1/TXO-1  (via drill 0.2)
  Top 0.152: U3.A9 v16.23,53.24
  Route15 0.152: v16.23,53.24 16.87,53.24 18.52,51.59 19.53,51.59 J4.15
~D2  (via drill 0.2)
  Top 0.152: U3.A8 v14.25,53.34
  Route15 0.152: v14.25,53.34 14.66,53.75 17.78,53.75 19.46,52.07 J4.16
~D3/A6  (via drill 0.2)
  Top 0.152: U3.E7 v12.23,47.87
  Route15 0.152: v12.23,47.87 9.08,47.87 8.13,46.91 7.24,46.91 6.48,47.68 3.12,47.68 2.44,46.99 J3.10
~D4  (via drill 0.2)
  Top 0.152: U3.E1 4.78,47.19 v4.06,47.19
  Route2 0.152: v4.06,47.19 2.77,47.19 2.39,46.81 2.39,45.26 1.57,44.45 J3.9
~D5  (via drill 0.2)
  Top 0.152: v5.47,49.24 v5.47,49.23 U3.D2
  Route2 0.152: v5.47,49.24 4.6,48.37 4.6,47.02 4.29,46.71 3,46.71 2.69,46.41 2.69,44.3 2.52,44.12 2.52,42.37 2.06,41.91 J3.8
~D6  (via drill 0.2)
  Top 0.152: U3.F2 5.44,45.15 5.44,45.14 v5.47,45.17 | v5.47,45.17
  Route2 0.152: v5.47,45.17 3.26,45.17 3.02,44.93 3.02,41.91 2.41,41.3 2.41,40.03 1.75,39.37 J3.7
~D7  (via drill 0.2)
  Top 0.152: v6.84,46.55 U3.E3
  Route15 0.152: v6.84,46.55 6.74,46.44 3.26,46.44 2.52,45.7 2.52,37.36 1.98,36.83 J3.6
~D8  (via drill 0.2)
  Top 0.152: U3.G4 v8.17,43.83
  Route15 0.152: v8.17,43.83 3.14,43.83 2.85,43.54 2.85,36.63 2.52,36.3 2.52,34.87 1.93,34.29 J3.5
~D9/A7  (via drill 0.2)
  Top 0.152: U3.F8 14.92,45.19 v14.94,45.19 | v13.61,39.67 12.39,38.46 v9.2,38.46
  Route2 0.152: v14.94,45.19 14.94,44.53 13.66,43.26 13.66,39.73 v13.61,39.67
  Route15 0.152: 7.59,36.91 7.59,37.8 8.26,38.46 v9.2,38.46 | J2.6 6.41,36.9 7.59,36.9 7.59,36.91 | 7.59,36.91 7.59,33.4 7.44,33.25 2.79,33.25 2.44,32.89 2.44,32.44 1.75,31.75 J3.4
~D11/MOSI
  Top 0.152: U3.H9 16.34,42.42 16.74,42.42 17.25,41.91 J4.12
~D12/MISO  (via drill 0.2)
  Top 0.152: U3.G3 8.2,45.21 8.2,45.2 v8.18,45.18
  Route15 0.152: v8.18,45.18 8.18,46.36 8.36,46.53 18.03,46.53 20.12,44.45 J4.13
~D13/SCK  (via drill 0.2)
  Top 0.152: v14.88,41.17 U3.J8
  Route15 0.152: v14.88,41.17 15.37,40.69 20.27,40.69 J4.11
~D15/QWIIC_SCL  (via drill 0.2)
  Top 0.152: U3.J5 10.21,41.79 v10.21,41.07
  Top 0.203: TP4.P$1 4.09,7.9 J6.4
  Route2 0.203: v10.21,41.07 8.41,39.27 8.41,33.43 6.43,31.45 4.14,31.45 3.76,31.06 3.76,7.67 TP4.P$1
~D16/SDA1
  Top 0.152: U3.E2 5.5,47.85 3.96,47.85 2.49,49.33 2.49,50.85 J3.12
~D17/SCL1
  Top 0.152: U3.F1 4,45.86 2.39,47.47 2.39,48.41 J3.11
~D18/LED  (via drill 0.2)
  Top 0.152: U3.F3 v6.83,45.19
  Top 0.203: v8.38,28.7 R12.2
  Route15 0.152: v6.83,45.19 6.83,44.75 6.93,44.65 10.87,44.65 11.66,43.87 11.66,41.4 12.43,40.63 12.43,38.19 10.85,36.6 10.85,29.52 10.03,28.7 v8.38,28.7
~D19/A0  (via drill 0.2)
  Top 0.152: U3.G8 14.94,43.82 14.94,43.81 v14.93,43.83
  Route2 0.152: v14.93,43.83 18.38,43.83 19,43.2 19,29.46 19.74,28.73 19.74,24.84 20.45,24.13 J4.5
~D20/A1  (via drill 0.2)
  Top 0.152: U3.G9 v16.35,44.51 v16.36,44.5
  Route2 0.152: v16.36,44.5 18.49,44.5 19.33,43.66 19.33,29.59 20.12,28.8 20.12,27.1 20.55,26.67 J4.6
~D21/A2  (via drill 0.2)
  Top 0.152: U3.G6 v12.19,43.87
  Route15 0.152: v12.19,43.87 12.69,43.87 13.45,43.1 13.45,40.7 14.22,39.93 18.34,39.93 19.76,38.51 19.76,31.04 J4.7
~D22/A3  (via drill 0.2)
  Top 0.152: U3.F7 v13.56,45.19
  Route15 0.152: v13.56,45.19 14.12,44.63 14.12,40.79 14.61,40.31 19.1,40.31 20.19,39.22 20.19,33.15 J4.8
~D23/A4  (via drill 0.2)
  Top 0.152: U3.E8 v13.56,47.88
  Route2 0.152: v13.56,47.88 | v13.56,47.88 13.56,46.74 13.77,46.53 18.8,46.53 20.02,45.31 20.02,34.77 20.5,34.29 J4.9
~D24/A5  (via drill 0.2)
  Top 0.152: U3.B9 15.62,51.23 v16.33,51.23
  Route2 0.152: v16.33,51.23 18.09,51.23 20.34,48.97 20.34,37.52 21.03,36.83 J4.10

## Text on the board
Bottom: v01
tDocu: Daniel Dobre